# Altium PCB ApePixelClock.PcbDoc
Units mil, origin at the board's own origin, x right, y up, seen from the top; angles counter-clockwise.
Board outline 2803.94 x 1547.24 mil, 2 copper layers (Top Layer, Bottom Layer); 20 components, 28 nets, 77 pads, 49 vias.
Unrouted connection lines stored in the file: 3.
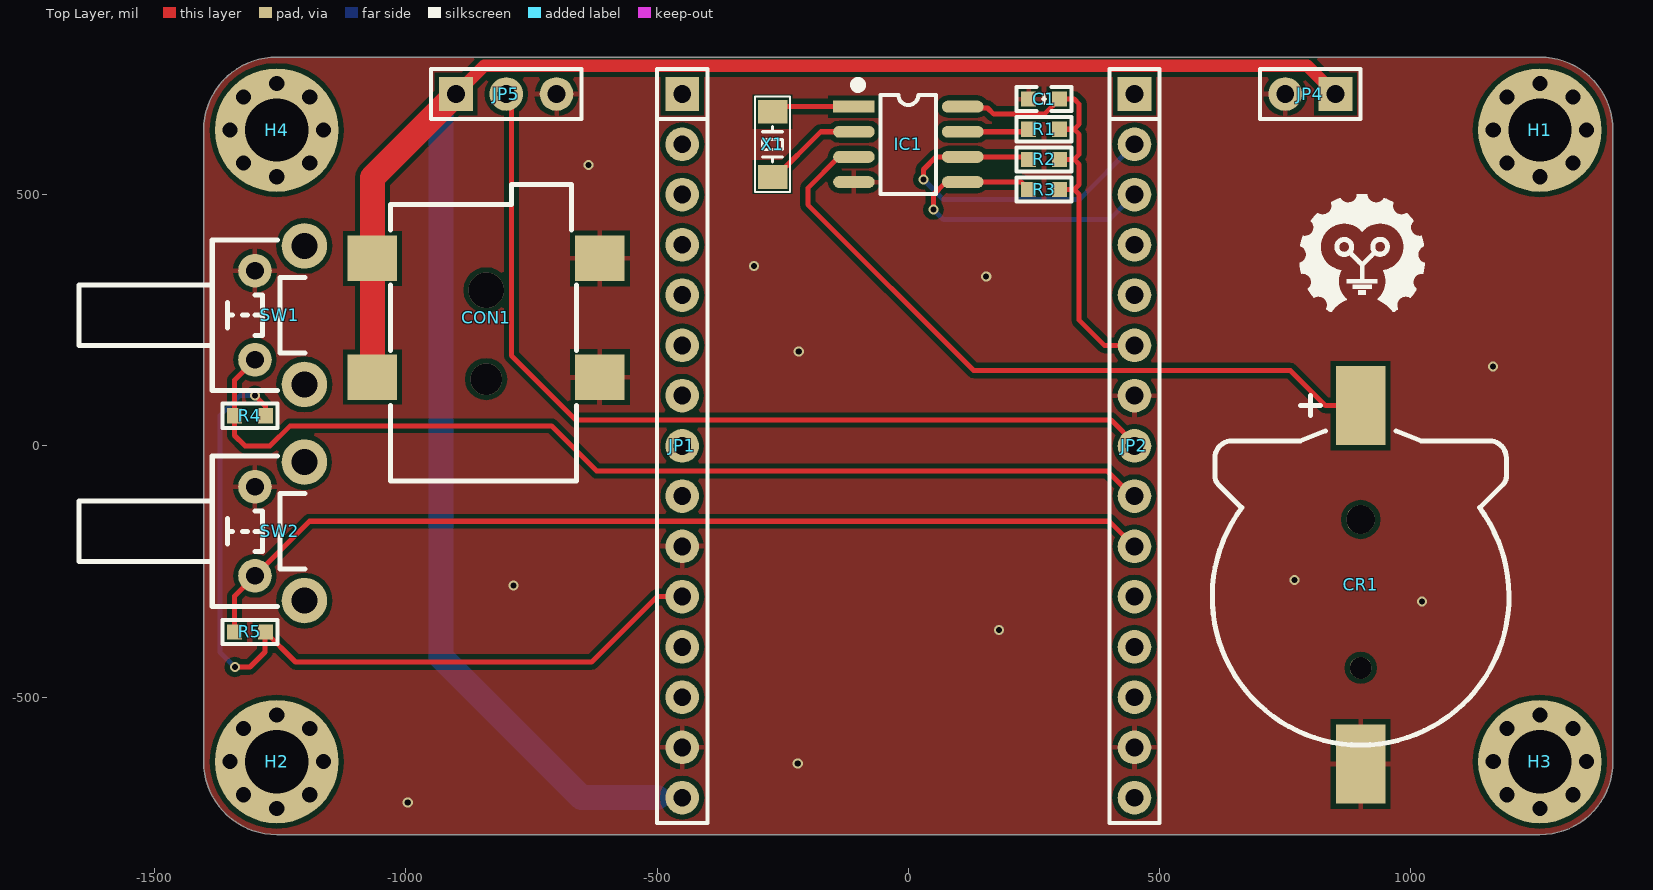
[diagram p0: Top Layer view]
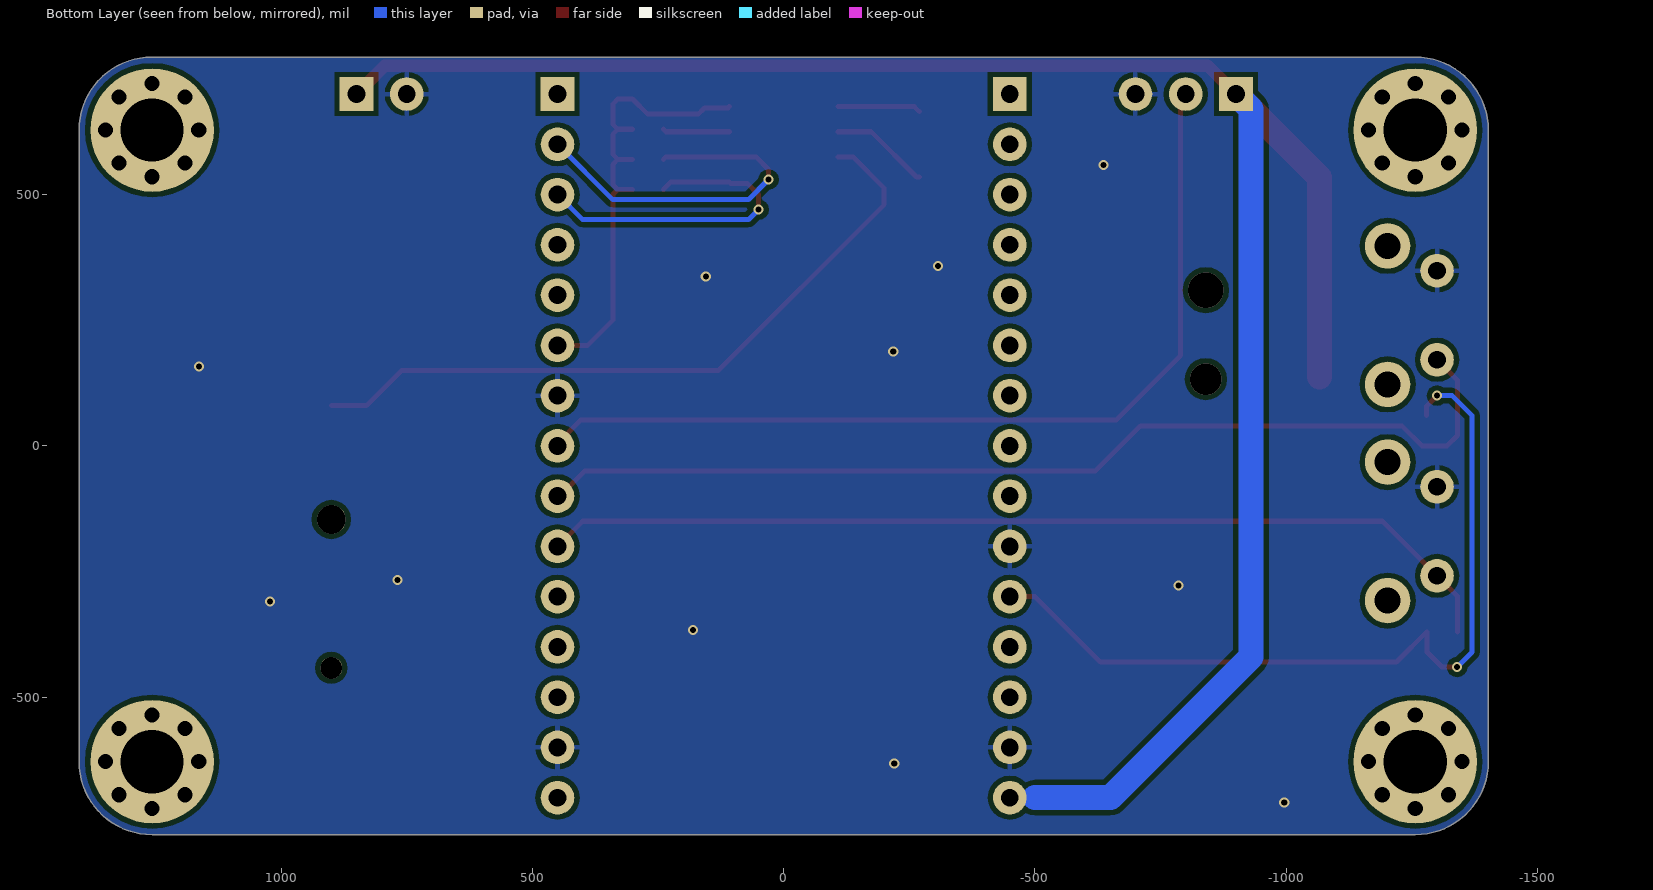
[diagram p1: Bottom Layer view, seen from below]

## Layer stack, top to bottom
Top Solder: solder mask 0.4, Solder Resist, Dk 3.5
Top Layer: signal copper 1.4
Dielectric 1: dielectric 12.6, FR-4, Dk 4.8
Bottom Layer: signal copper 1.4
Bottom Solder: solder mask 0.4, Solder Resist, Dk 3.5

## Board outline
-1401.97,-628.35 -1401.97,628.35 cw(c-1256.69,628.35) -1256.69,773.62 1256.69,773.62 cw(c1256.69,628.35) 1401.97,628.35 1401.97,-628.35 cw(c1256.69,-628.35) 1256.69,-773.62 -1256.69,-773.62 cw(c-1256.69,-628.35)

## Design rules (kind name [scope] priority, off if disabled: settings)
Clearance [All] p1: gap=10 ignorepadtopadclearanceinfootprint=FALSE except(0: Arc-Hole Track-Hole SMDPad-Hole THPad-Hole Via-Hole Fill-Hole Poly-Hole Region-Hole Text-Hole)
PlaneConnect [All] p1: pad.planeconnectstyle=Relief pad.reliefexpansion=20 pad.reliefentries=4 pad.reliefconductorwidth=10 pad.reliefairgap=10 via.planeconnectstyle=Direct via.reliefexpansion=20 via.reliefentries=4 via.reliefconductorwidth=10 via.reliefairgap=10
PolygonConnect [All] p1: thpad.connectstyle=Relief thpad.reliefconductorwidth=10 thpad.reliefentries=4 thpad.polygonreliefangle="90 Angle" thpad.airgapwidth=10 smdpad.connectstyle=Relief smdpad.reliefconductorwidth=10 smdpad.reliefentries=4 smdpad.polygonreliefangle="90 Angle" smdpad.airgapwidth=10 via.connectstyle=Direct via.reliefconductorwidth=10 via.reliefentries=4 via.polygonreliefangle="90 Angle" via.airgapwidth=10
RoutingVias [All] p1: holewidth=12 width=20 viastyle="Through Hole" minholewidth=12 minwidth=20 maxholewidth=12 maxwidth=20
SolderMaskExpansion [All] p1: expansion=4
Width [All] p1: maxlimit=100 minlimit=5 preferedwidth=10
29 further rules are at their usual default settings.

## Components (designator, comment, footprint, x,y, rotation, side; value= is the part's Value field where it differs from the comment)
C1 "104" "C 0603_L" 270,690 r180 top
CON1 "3.5*1.3" DC-050 -840,310 r90 top
CR1 "1220" CR1220_B 900,-300 r90 top
H1 "兼容乐高梅花固定孔" LegoVia 1256.69,628.35 r0 top
H2 "兼容乐高梅花固定孔" LegoVia -1256.69,-628.35 r0 top
H3 "兼容乐高梅花固定孔" LegoVia 1256.69,-628.35 r0 top
H4 "兼容乐高梅花固定孔" LegoVia -1256.69,628.35 r0 top
IC1 "DS1307" SOP8_M 0,600 r0 top
JP1 "HDR-1X15" HDR2.54-M-LI-15P -450,0 r270 top
JP2 "HDR-1X15" HDR2.54-M-LI-15P 450,0 r270 top
JP4 "HDR-1X2" HDR2.54-LI-2P 800,700 r180 top
JP5 "HDR-1X3" HDR2.54-LI-3P -800,700 r0 top
R1 "4k7" "R 0603_L" 270,630 r0 top
R2 "4k7" "R 0603_L" 270,570 r0 top
R3 "4k7" "R 0603_L" 270,510 r0 top
R4 "1K" "R 0603_L" -1310,60 r0 top
R5 "1K" "R 0603_L" -1310,-370 r0 top
SW1 "6x6x5" "TSW DIP-6*6*10_V" -1300,260 r270 top
SW2 "6x6x5" "TSW DIP-6*6*10_V" -1300,-170 r270 top
X1 "32.768KHz" "OSC 3215-2P" -270,600 r90 top

## Footprints (in the part's own frame and the unit in brackets; to place one, negate y for a bottom-side part, rotate by r counter-clockwise, add the part's x,y. Pads: shape width x height; smd on the part's side, far side on the other; paste and mask are expansions set on the pad)
"C 0603_L" [mil] "无极性贴片电容"
  rect 30x30 smd: 1(-30.59,0) 2(30.59,0)
  silkscreen extent -55,-24 55,24, body extent -31,-16 31,16, height 32
CR1220_B [mm] "纽扣电池座"
  round 1.1 hole 1.1: 0(-3.6,0)
  round 1.45 hole 1.45: 0(3.9,0)
  rect 4x2.5 smd: 1(9.652,0) 2(-8.458,0)
  silkscreen extent -7.5,-7.5 10.16,7.5, body extent -9.42,-7.45 10.34,7.45, height 4.05
DC-050 [mm] "5.5*2.1"
  rect 2.3x2.5 smd: 1(-4.4,5.75) 1(1.6,5.75) 2(1.6,-5.75) 3(-4.4,-5.75)
  silkscreen extent -9.65,-4.57 5.33,4.83, body extent -9.5,-6.3 5.3,6.3, height 11
HDR2.54-LI-2P [mm] "排针，2脚"
  rect 1.7x1.7 hole 0.9: 1(-1.27,0)
  round 1.7 hole 0.9: 2(1.27,0)
  silkscreen extent -2.54,-1.27 2.54,1.27, body extent -2.54,-1.27 2.54,1.27, height 8.5
HDR2.54-LI-3P [mm] "排针，3脚"
  rect 1.7x1.7 hole 0.9: 1(-2.54,0)
  round 1.7 hole 0.9: 2(0,0) 3(2.54,0)
  silkscreen extent -3.81,-1.27 3.81,1.27, body extent -3.81,-1.27 3.81,1.27, height 8.5
HDR2.54-M-LI-15P [mm] "排母，15脚"
  rect 1.7x1.7 hole 0.9: 1(-17.78,0)
  round 1.7 hole 0.9: 2(-15.24,0) 3(-12.7,0) 4(-10.16,0) 5(-7.62,0) 6(-5.08,0) 7(-2.54,0) 8(0,0) 9(2.54,0) 10(5.08,0) 11(7.62,0) 12(10.16,0) 13(12.7,0) 14(15.24,0) 15(17.78,0)
  silkscreen extent -19.05,-1.27 19.05,1.27, body extent -19.05,-1.27 19.05,1.27, height 8.5
LegoVia [mm]
  round 6.24 hole 3.2: ""(0,0)
"OSC 3215-2P" [mm] "3.2*1.5*0.6mm(长宽高)"
  rect 1.2x1.5 smd: 1(-1.65,0) 2(1.65,0)
  silkscreen extent -2.41,-0.89 2.41,0.89, body extent -1.6,-0.75 1.6,0.75, height 0.61
"R 0603_L" [mil] "1/10W贴片电阻"
  rect 30x30 smd: 1(-30.59,0) 2(30.59,0)
  silkscreen extent -55,-24 55,24, body extent -31,-16 32,16, height 16
SOP8_M [mm] "5*6*1.8mm（长宽高）"
  rect 2.1x0.6 smd: 1(-2.75,1.905)
  oval 2.1x0.6 smd: 2(-2.75,0.635) 3(-2.75,-0.635) 4(-2.75,-1.905) 5(2.75,-1.905) 6(2.75,-0.635) 7(2.75,0.635) 8(2.75,1.905)
  silkscreen extent -2.69,-2.5 1.4,3.15, body extent -3,-2.5 3,2.5, height 1.9
"TSW DIP-6*6*10_V" [mm] "侧按轻触开关 6*6*10mm"
  round 2.3 hole 1.3: 0(-3.5,2.5) 0(3.5,2.5)
  round 1.7 hole 0.9: 1(-2.25,0) 2(2.25,0)
  silkscreen extent -3.81,-8.89 3.81,2.54, body extent -4.18,-8.72 4.18,4.13, height 7.47

## Part data
C1: library part C, "无极性贴片电容"
CON1: library part P-DC, "低压电源接口", BOM名称=DC电源接口, 学习资源=www.ooocke.com, 版权归属=源创客
CR1: library part CR-3V, "微型电池"
IC1: "1307实时时钟芯片", BOM名称=实时时钟芯片, 学习资源=www.ooocke.com, 版权归属=源创客
JP1 JP2: library part "Header 15", "15P接插件", BOM名称=15P接插件, 学习资源=www.ooocke.com, 版权归属=源创客
JP4: library part "Header 2", "2P接插件", BOM名称=2P接插件, 学习资源=www.ooocke.com, 版权归属=源创客
JP5: library part "Header 3", "3P接插件", BOM名称=3P接插件, 学习资源=www.ooocke.com, 版权归属=源创客
R1 R2 R3 R4 R5: library part R, "贴片电阻"
SW1 SW2: library part "TSW DIP-6x6_V", "侧按直插6x6轻触开关"
X1: library part XTAL-2P, "2脚无源脚晶振", BOM名称=2脚无源脚晶振, 学习资源=www.ooocke.com, 版权归属=源创客

## Via types
v1: diameter 30, hole 30, Top Layer to Bottom Layer, 32 vias
v2: diameter 20, hole 12, Top Layer to Bottom Layer, 15 vias
v3: diameter 62.99, hole 62.99, Top Layer to Bottom Layer, 1 vias
v4: diameter 70.87, hole 70.87, Top Layer to Bottom Layer, 1 vias

## Nets (pads, with @x,y where several pads share a name; then routed paths per layer and width w, separated by ;. In a path a pad name is that pad's centre, name@x,y a point inside that pad or via, vN(x,y) a via of type N, cw(c..) or ccw(c..) an arc to the next point about the centre after c; other vN are vias at no path point)
3V3: C1.1 IC1.8 JP1.11 JP2.6 JP2.15 R1.2 R2.2 R3.2 R4.2 R5.2 | length 2596.6
  Top Layer w10: v2(-1340,-440) -1310,-440 -1280,-410 -1280,-370.59 R5.2 -1219.41,-430 -630,-430 -500,-300 JP1.11 ; v2(-1300,100) -1279.41,79.41 R4.2 ; IC1.8 110.87,672.39 157.61,672.39 170,660 270.59,660 C1.1 330,690 340,680 340,640 330,630 ; R3.2 330,510 ; R2.2 330,570 ; R1.2 330,630 ; JP2.6 390,200 340,250 340,500 330,510 ; 330,510 340,520 340,560 330,570 ; 330,570 340,580 340,620 330,630
  Bottom Layer w10: v2(-1340,-440) -1370,-410 -1370,60 -1330,100 v2(-1300,100)
A0: JP1.1
CLK: JP1.9
CMD: JP1.7
D0: JP2.1
D1: IC1.6 JP2.2 R2.1 | length 724
  Top Layer w10: v2(30,530) 30,550 55,575 IC1.6 234.41,575 R2.1
  Bottom Layer w10: v2(30,530) 70,490 340,490 JP2.2
D2: IC1.5 JP2.3 R3.1 | length 665
  Top Layer w10: v2(50,470) 50,500 72.39,522.39 105.66,522.39 IC1.5 224.41,525 R3.1
  Bottom Layer w10: v2(50,470) 70,450 400,450 JP2.3
D3: JP2.4
D4: JP2.5
D5: JP2.8 JP5.2 | length 1840.2
  Top Layer w10: JP5.2 -789.57,689.57 -789.57,179.57 -661.54,51.54 403.46,51.54 JP2.8@452.5,2.5
D6: JP2.9 R4.1 SW1.2 | length 2040.1
  Top Layer w10: SW1.2 -1340.59,130.83 R4.1 -1340.59,20.59 -1320,0 -1270,0 -1230,40 -710,40 -620,-50 396,-50 JP2.9@448,-102
D7: JP2.10 R5.1 SW2.2 | length 1943.9
  Top Layer w10: R5.1 -1340.59,-299.17 SW2.2 -1191.42,-150 400,-150 JP2.10
D8: JP2.11
EN: JP1.12
GND: C1.2 CON1.2 CON1.3 CR1.2 IC1.4 JP1.10 JP1.14 JP2.7 JP2.14 JP4.2 JP5.3 SW1.1 SW2.1
  other v2: -996,-710 -220,-632 180,-366 1022,-310 -786,-278 768,-267 1163,158 -218,188 155,337 -307,358 -636,559
NetCR1_1: CR1.1 IC1.3 | length 1416
  Top Layer w10: IC1.3 -137.8,575 -200,512.8 -200,480 130,150 760,150 830,80 CR1.1
NetIC1_1: IC1.1 X1.2 | length 165.9
  Top Layer w10: X1.2 -259.96,675 IC1.1
NetIC1_2: IC1.2 X1.1 | length 199
  Top Layer w10: X1.1 -264.09,535.04 -174.13,625 IC1.2
NetIC1_7: IC1.7 R1.1 | length 133.2
  Top Layer w10: IC1.7 234.41,625 R1.1
RST: JP1.13
RSV: JP1.2 JP1.3
RX: JP2.12
SD0: JP1.8
SD1: JP1.6
SD2: JP1.5
SD3: JP1.4
TX: JP2.13
Vin: CON1.1 JP1.15 JP4.1 JP5.1 | length 4106.9
  Top Layer w25: JP5.1 -844.04,755.96 794.04,755.96 JP4.1
  Top Layer w50: CON1.1@-1066.38,136.77 -1066.38,372.99 -1066.38,533.62 JP5.1
  Bottom Layer w50: JP5.1 -930,670 -930,-420 -650,-700 -500,-700
pads on no net: CR1.0 H1. H2. H3. H4. SW1.0 SW2.0
copper on no net:
  other v1: -1256.69,-721.26 1256.69,-721.26 -1322.44,-694.09 -1190.94,-694.09 1190.94,-694.09 1322.44,-694.09 -1349.61,-628.35 -1163.78,-628.35 1163.78,-628.35 1349.61,-628.35 -1322.44,-562.6 -1190.94,-562.6 1190.94,-562.6 1322.44,-562.6 -1256.69,-535.43 1256.69,-535.43 -1256.69,535.43 1256.69,535.43 -1322.44,562.6 -1190.94,562.6 1190.94,562.6 1322.44,562.6 -1349.61,628.35 -1163.78,628.35 1163.78,628.35 1349.61,628.35 -1322.44,694.09 -1190.94,694.09 1190.94,694.09 1322.44,694.09 -1256.69,721.26 1256.69,721.26
  other v3: -840,132.83
  other v4: -840,310

## Polygon pours and split planes (outlines as drawn)
GND on Top Layer "Top Layer-No Net" (solid, remove dead copper, pour order 0): -1401.97,-628.35 -1401.97,628.35 cw(c-1256.69,628.35) -1256.69,773.62 1256.69,773.62 cw(c1256.69,628.35) 1401.97,628.35 1401.97,-628.35 cw(c1256.69,-628.35) 1256.69,-773.62 -1256.69,-773.62 cw(c-1256.69,-628.35)
GND on Bottom Layer "Top Layer-No Net1" (solid, remove dead copper, pour order 1): -1401.97,-628.35 -1401.97,628.35 cw(c-1256.69,628.35) -1256.69,773.62 1256.69,773.62 cw(c1256.69,628.35) 1401.97,628.35 1401.97,-628.35 cw(c1256.69,-628.35) 1256.69,-773.62 -1256.69,-773.62 cw(c-1256.69,-628.35)

## Silkscreen, mask and mechanical layers (free items; w line width, h text height)
Top Overlay:
  drawing of 1389 lines, arcs and shapes, not listed
Mechanical 1:
  the board outline again, w10